# Altium PCB PCB_big.PcbDoc (part 1 of 2)
Units mil, origin at the board's own origin, x right, y up, seen from the top; angles counter-clockwise.
Board outline 3000 x 3000 mil, 2 copper layers (Top Layer, Bottom Layer); 49 components, 129 nets, 355 pads, 242 vias.
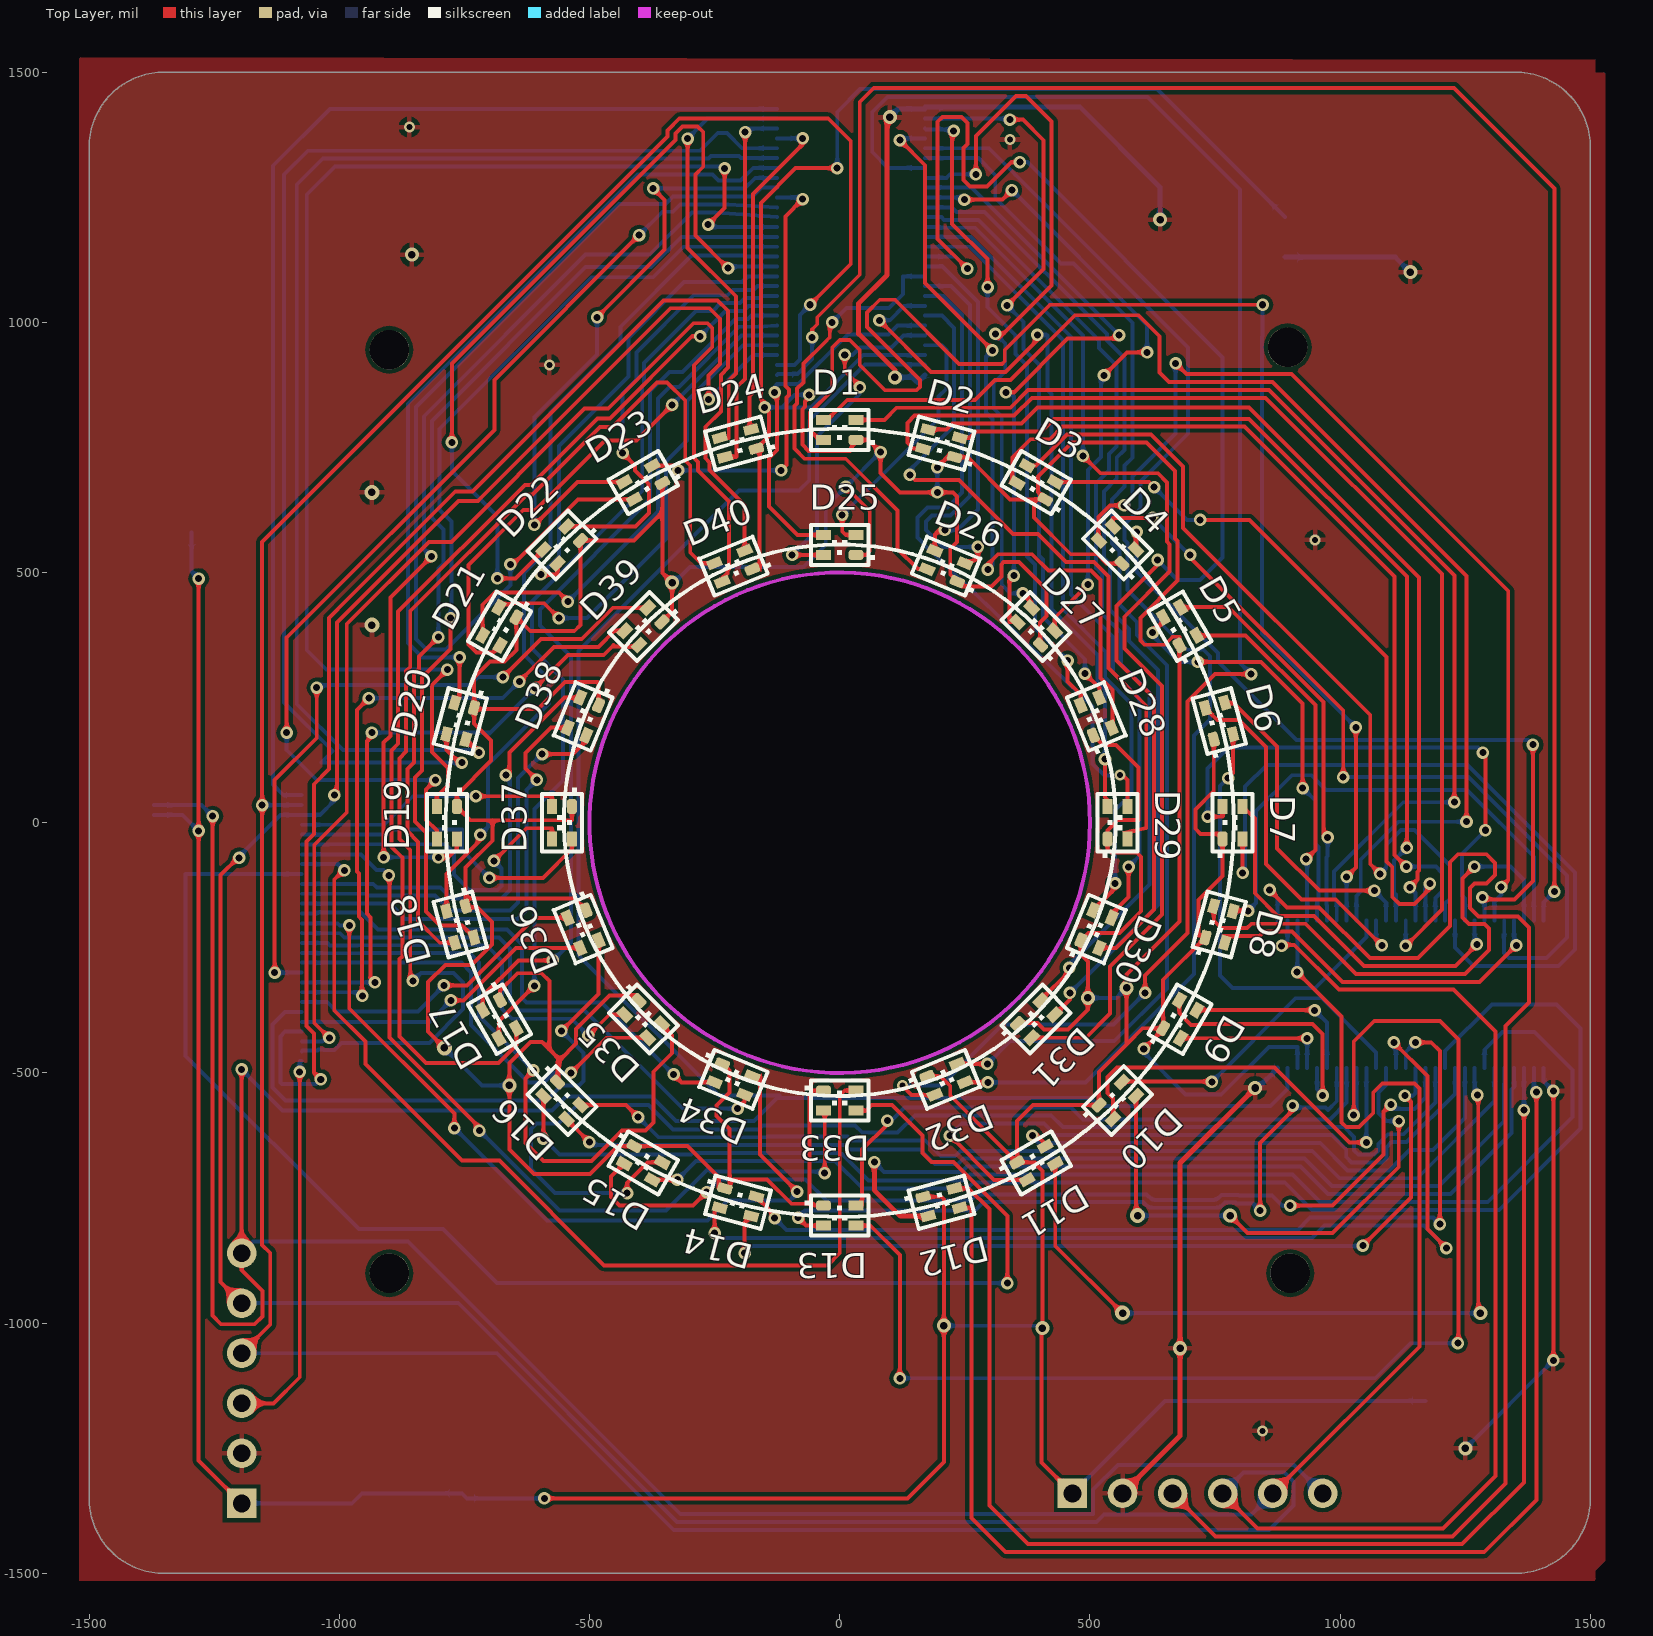
[diagram p0: Top Layer view]
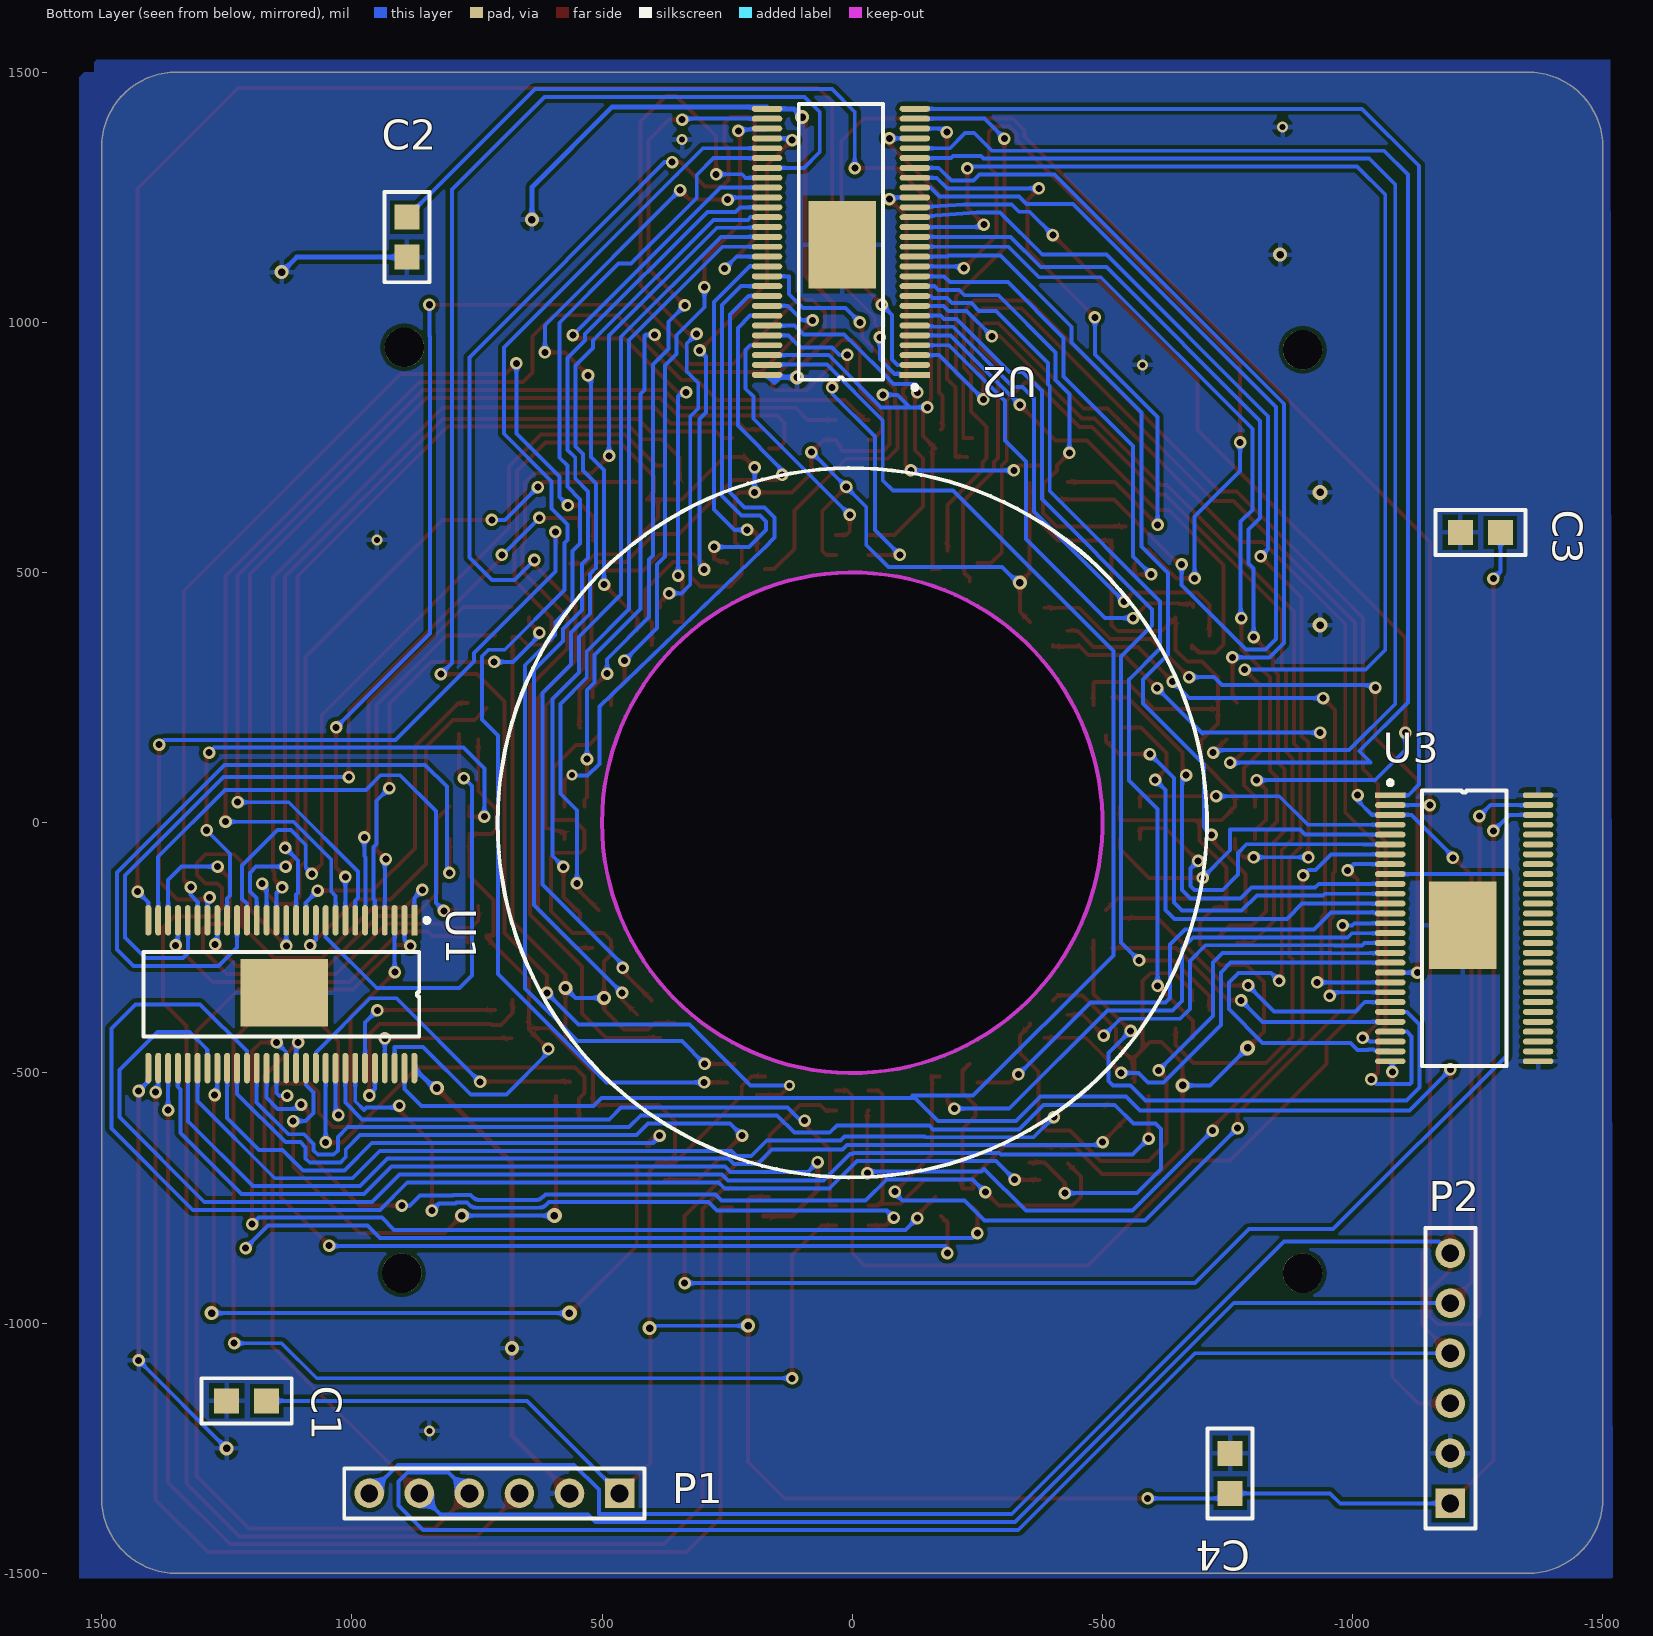
[diagram p1: Bottom Layer view, seen from below]

## Layer stack, top to bottom
Top Solder: solder mask 0.4, Solder Resist, Dk 3.5
Top Layer: signal copper 1.4
Dielectric 1: dielectric 12.6, FR-4, Dk 4.8
Bottom Layer: signal copper 1.4
Bottom Solder: solder mask 0.4, Solder Resist, Dk 3.5

## Board outline
-1350,-1500 cw(c-1350,-1350) -1500,-1350 -1500,1350 cw(c-1350,1350) -1350,1500 1350,1500 cw(c1350,1350) 1500,1350 1500,-1350 cw(c1350,-1350) 1350,-1500
cut-out: 0,-500 cw(c0,0) -500,0 cw(c0,0) 0,500 cw(c0,0) 500,0 cw(c0,0)

## Design rules (kind name [scope] priority, off if disabled: settings)
Clearance [All] p1: gap=7.87 ignorepadtopadclearanceinfootprint=FALSE except(0: Arc-Hole Track-Hole SMDPad-Hole THPad-Hole Via-Hole Fill-Hole Poly-Hole Region-Hole Text-Hole)
HoleSize [All] p1: absolutevalues=TRUE maxlimit=200 minlimit=10 maxpercent=80.000 minpercent=20.000
HoleToHoleClearance [All] p1: gap=7.87 allowstackedmicrovias=TRUE
MinimumSolderMaskSliver [All] p1: minsoldermaskwidth=7.87
PolygonConnect [All] p1: connectstyle=Relief reliefconductorwidth=10 reliefentries=4 polygonreliefangle="90 Angle" airgapwidth=10
RoutingVias [All] p1: holewidth=14 width=25 viastyle="Through Hole" minholewidth=10 minwidth=10 maxholewidth=50 maxwidth=80
SilkToSilkClearance [All] p1: silktosilkclearance=7.87
SilkToSolderMaskClearance [IsPad] p1: minsilkscreentomaskgap=7.87 clearancetoexposedcopper=TRUE
SolderMaskExpansion [All] p1: expansion=4
Width [All] p1: maxlimit=80 minlimit=6 preferedwidth=7.87
25 further rules are at their usual default settings.

## Components (designator, comment, footprint, x,y, rotation, side; value= is the part's Value field where it differs from the comment)
C1 "Cap" CAP_0805 1210,-1155 r180 bottom
C2 "Cap" CAP_0805 890,1170 r90 bottom
C3 "Cap" CAP_0805 -1255,580 r180 bottom
C4 "Cap" CAP_0805 -755,-1300 r270 bottom
D1 "LED1616" LED1616 0,785 r0 top
D2 "LED1616" LED1616 203.17,758.25 r345 top
D3 "LED1616" LED1616 392.5,679.83 r330 top
D4 "LED1616" LED1616 555.08,555.08 r315 top
D5 "LED1616" LED1616 679.83,392.5 r300 top
D6 "LED1616" LED1616 758.25,203.17 r285 top
D7 "LED1616" LED1616 785,0 r270 top
D8 "LED1616" LED1616 758.25,-203.17 r255 top
D9 "LED1616" LED1616 679.83,-392.5 r240 top
D10 "LED1616" LED1616 555.08,-555.08 r225 top
D11 "LED1616" LED1616 392.5,-679.83 r210 top
D12 "LED1616" LED1616 203.17,-758.25 r195 top
D13 "LED1616" LED1616 0,-785 r180 top
D14 "LED1616" LED1616 -203.17,-758.25 r165 top
D15 "LED1616" LED1616 -392.5,-679.83 r150 top
D16 "LED1616" LED1616 -555.08,-555.08 r135 top
D17 "LED1616" LED1616 -679.83,-392.5 r120 top
D18 "LED1616" LED1616 -758.25,-203.17 r105 top
D19 "LED1616" LED1616 -785,0 r90 top
D20 "LED1616" LED1616 -758.25,203.17 r75 top
D21 "LED1616" LED1616 -679.83,392.5 r60 top
D22 "LED1616" LED1616 -555.08,555.08 r45 top
D23 "LED1616" LED1616 -392.5,679.83 r30 top
D24 "LED1616" LED1616 -203.17,758.25 r15 top
D25 "LED1616" LED1616 0,555 r0 top
D26 "LED1616" LED1616 212.39,512.75 r337.5 top
D27 "LED1616" LED1616 392.44,392.44 r315 top
D28 "LED1616" LED1616 512.75,212.39 r292.5 top
D29 "LED1616" LED1616 555,0 r270 top
D30 "LED1616" LED1616 512.75,-212.39 r247.5 top
D31 "LED1616" LED1616 392.44,-392.44 r225 top
D32 "LED1616" LED1616 212.39,-512.75 r202.5 top
D33 "LED1616" LED1616 0,-555 r180 top
D34 "LED1616" LED1616 -212.39,-512.75 r157.5 top
D35 "LED1616" LED1616 -392.44,-392.44 r135 top
D36 "LED1616" LED1616 -512.75,-212.39 r112.5 top
D37 "LED1616" LED1616 -555,0 r90 top
D38 "LED1616" LED1616 -512.75,212.39 r67.5 top
D39 "LED1616" LED1616 -392.44,392.44 r45 top
D40 "LED1616" LED1616 -212.39,512.75 r22.5 top
P1 "Header 6" HDR1X6 465,-1340 r0 bottom
P2 "Header 6" HDR1X6 -1195,-1360 r90 bottom
U1 "Tlc5955" TCL5955-2 875,-195 r270 bottom
U2 "Tlc5955" TCL5955-2 -125,895 r0 bottom
U3 "Tlc5955" TCL5955-2 -1075,55 r180 bottom

## Footprints (in the part's own frame and the unit in brackets; to place one, negate y for a bottom-side part, rotate by r counter-clockwise, add the part's x,y. Pads: shape width x height; smd on the part's side, far side on the other; paste and mask are expansions set on the pad)
CAP_0805 [mil]
  rect 50x50 smd: 1(-40,0) 2(40,0)
  silkscreen extent -90,-45 90,45
HDR1X6 [mm] "Connector; Header; 6 Position"
  rect 1.5x1.5 hole 0.9: 1(0,0)
  round 1.5 hole 0.9: 2(2.54,0) 3(5.08,0) 4(7.62,0) 5(10.16,0) 6(12.7,0)
  silkscreen extent -1.27,-1.27 13.97,1.27
LED1616 [mil]
  rrect50% 29.53x19.68 smd: 1(32.5,-20)
  rect 29.53x19.68 smd: 2(-32.5,-20) 3(-32.5,20) 4(32.5,20)
  silkscreen extent -58,-40 70,40
TCL5955-2 [mm]
  rect 1.55x0.3 smd: 1(0,0)
  oval 1.55x0.3 smd: 2(0,-0.5) 3(0,-1) 4(0,-1.5) 5(0,-2) 6(0,-2.5) 7(0,-3) 8(0,-3.5) 9(0,-4) 10(0,-4.5) 11(0,-5) 12(0,-5.5) 13(0,-6) 14(0,-6.5) 15(0,-7) 16(0,-7.5) 17(0,-8) 18(0,-8.5) 19(0,-9) 20(0,-9.5) 21(0,-10) 22(0,-10.5) 23(0,-11) 24(0,-11.5) 25(0,-12) 26(0,-12.5) 27(0,-13) 28(0,-13.5) 29(7.5,-13.5) 30(7.5,-13) 31(7.5,-12.5) 32(7.5,-12) 33(7.5,-11.5) 34(7.5,-11) 35(7.5,-10.5) 36(7.5,-10) 37(7.5,-9.5) 38(7.5,-9) 39(7.5,-8.5) 40(7.5,-8) 41(7.5,-7.5) 42(7.5,-7) 43(7.5,-6.5) 44(7.5,-6) 45(7.5,-5.5) 46(7.5,-5) 47(7.5,-4.5) 48(7.5,-4) 49(7.5,-3.5) 50(7.5,-3) 51(7.5,-2.5) 52(7.5,-2) 53(7.5,-1.5) 54(7.5,-1) 55(7.5,-0.5) 56(7.5,0)
  rect 3.429x4.445 smd: 57(3.683,-6.604)
  silkscreen extent -0.13,-13.75 5.89,0.76

## Part data
C1 C2 C3 C4: "Capacitor"
D1 D2 D3 D4 D5 D6 D7 D8 D9 D10 D11 D12 D13 D14 D15 D16 D17 D18 D19 D20 D21 D22 D23 D24 D25 D26 D27 D28 D29 D30 D31 D32 D33 D34 D35 D36 D37 D38 D39 D40: library part LED
P1 P2: "Header, 6-Pin"
U1 U2 U3: library part Tlc5955_2

## Free pads (board coordinates)
  round 78.74 hole 78.74: 0(-900,-900) 0(-900,945) 0(895,950) 0(900,-900)

## Via types
v1: diameter 25, hole 14, Top Layer to Bottom Layer, 214 vias
v2: diameter 28, hole 15, Top Layer to Bottom Layer, 16 vias
v3: diameter 22, hole 12, Top Layer to Bottom Layer, 7 vias
v4: diameter 30, hole 15, Top Layer to Bottom Layer, 5 vias

## Nets (pads, with @x,y where several pads share a name; then routed paths per layer and width w, separated by ;. In a path a pad name is that pad's centre, name@x,y a point inside that pad or via, vN(x,y) a via of type N, cw(c..) or ccw(c..) an arc to the next point about the centre after c; other vN are vias at no path point)
D1_B: D1.4 U1.7 | length 2224.3
  Top Layer w7.87: D1.4@32.5,805 89,805 113.25,829.25 340.94,829.25 376.43,864.75 857.52,864.75 1228,494.27 v1(1228,41)
  Bottom Layer w7.87: U1.7@993.11,-195 993.11,-155.11 988,-150 988,-97 1126,41 v1(1228,41)
D1_G: D1.3 U1.9 | length 2488.3
  Top Layer w7.87: D1.3@-32.5,805 -25,805 15,845 270,845 310,885 341,885 470,1014 597,1014 639,972 639,899.6 658.1,880.5 864.49,880.5 1252.31,492.67 v1(1252.31,2)
  Bottom Layer w7.87: U1.9@1032.48,-195 1032.48,-146 1041,-137.48 1041,-73.11 1116.11,2 v1(1252.31,2)
D1_R: D1.2 U1.8 | length 2886.5
  Top Layer w7.87: D1.2@-32.5,765 -40.24,765 -58.44,783.21 -58.44,789.64 -59.07,790.27 -59.07,819.73 -15,863.81 -15,950 0,965 20,965 40,945 40,915 90.81,864.19 153.44,864.19 160,870.75 160,885 54.78,990.22 54.78,1019.78 80,1045 110,1045 238.34,916.66 324.3,916.66 329.7,922.07 329.7,944.51 420.19,1035 v1(845,1035) ; v1(1012.79,-108) 1031.31,-89.48 v1(1031.31,190.67)
  Bottom Layer w7.87: v1(845,1035) 845,972.38 843.82,971.2 843.82,378.17 v1(1031.31,190.67) ; U1.8@1012.8,-195 v1(1012.79,-108)
D2_B: D2.4 U1.13 | length 1738.4
  Top Layer w7.87: D2.4@239.74,769.16 259.25,769.16 272.1,782.01 403.23,782.01 428.29,807.07 817.93,807.07 1133,492 v1(1133,-50)
  Bottom Layer w7.87: U1.13@1111.22,-195 1111.22,-143.69 1107.69,-140.15 1107.69,-75.31 v1(1133,-50)
D2_G: D2.3 U1.15 | length 1836.7
  Top Layer w7.87: D2.3@176.96,785.98 213,785.98 224.77,797.76 362.74,797.76 394.93,829.94 817.33,829.94 1157.31,489.96 1157.31,-95.69 1154.7,-98.3 1154.7,-113.3 v1(1139,-129)
  Bottom Layer w7.87: v1(1139,-129) 1150.59,-140.59 U1.15@1150.59,-195
D2_R: D2.2 U1.14 | length 2134.5
  Top Layer w7.87: D2.2@166.6,747.34 147.66,747.34 135,760 135,799 149.5,813.5 348.42,813.5 383.92,849 851,849 1203.31,496.69 1203.31,-173.59 v1(1130.9,-246)
  Bottom Layer w7.87: v1(1130.9,-246) U1.14@1130.91,-195
D3_B: D3.4 U1.16 | length 1471.3
  Top Layer w7.87: D3.4@430.65,680.9 618.1,680.9 v1(628.25,670.75) ; v1(720,605) 818.59,605 1092.63,330.96 1092.63,-77.16 1103.95,-88.49 1103.95,-148 1118.6,-162.65 1148,-162.65 1178.97,-131.67 v1(1178.97,-121.73)
  Bottom Layer w7.87: v1(628.25,670.75) 694,605 v1(720,605) ; U1.16@1170.28,-195 1170.27,-130.42 v1(1178.97,-121.73)
D3_G: D3.3 U1.18 | length 1685.6
  Top Layer w7.87: D3.3@374.35,713.4 392.07,713.4 454.24,775.58 622.28,775.58 685.81,712.05 685.81,589.19 1060,215 1060,-82.36 v1(1079.64,-102)
  Bottom Layer w7.87: v1(1079.64,-102) 1091.94,-89.7 1091.94,-44.44 1121.86,-14.51 1148,-14.51 1219.06,-85.57 1219.06,-151.95 1209.64,-161.37 U1.18@1209.64,-195
D3_R: D3.2 U1.17 | length 1734.2
  Top Layer w7.87: D3.2@354.35,678.76 344.84,688.28 344.84,729.84 381.26,766.26 419.95,766.26 445.02,791.32 808.68,791.32 1108.38,491.62 1108.38,-64.08 v1(1132,-87.7)
  Bottom Layer w7.87: v1(1132,-87.7) 1191.01,-87.7 1203.31,-100 1203.31,-137.31 1189.96,-150.66 U1.17@1189.96,-195
D4_B: D4.4 U1.22 | length 1497.2
  Top Layer w7.87: D4.4@592.2,546.24 592.2,580.2 v1(593,581) ; v1(1284,-149) 1288,-153 1348,-153 1385,-116 v1(1385,156)
  Bottom Layer w7.87: v1(593,581) 593,502 755.75,339.25 755.75,322.25 912.25,165.75 1375.25,165.75 v1(1385,156) ; v1(1284,-149) 1288.38,-153.38 U1.22@1288.39,-195
D4_G: D4.3 U1.24 | length 1634.3
  Top Layer w7.87: D4.3@546.24,592.2 546.24,609 612.31,609 v1@619.25,602.06 ; v1(700,535) 700,530 1006,224 v1(1006,91)
  Bottom Layer w7.87: v1(625,609) 699,535 v1(700,535) ; v1(1006,91) 1256.73,91 1453,-105.27 1453,-229.5 1412.5,-270 1337,-270 1327,-260 1327,-223 1327.75,-223 U1.24@1327.76,-195
D4_R: D4.2 U1.23 | length 1958
  Top Layer w7.87: D4.2@517.96,563.92 517.03,563.92 517.03,611.03 540,634 v1(568,634) ; v1(671,918) 692.76,896.24 902.76,896.24 1335.69,463.31 1335.69,-114.31 v1(1321.37,-128.63)
  Bottom Layer w7.87: v1(568,634) 584.94,650.94 584.94,691.94 671,778 v1(671,918) ; U1.23@1308.07,-195 1308.07,-157.93 1321.37,-144.63 v1(1321.37,-128.63)
D5_B: D5.4 U1.4 | length 733.3
  Top Layer w7.87: D5.4@713.4,374.35 811.1,374.35 950.52,234.93 950.52,-54.16 v1(932,-72.69)
  Bottom Layer w7.87: v1(932,-72.69) 934.05,-74.74 U1.4@934.05,-195
D5_G: D5.3 U1.6 | length 805.4
  Top Layer w7.87: D5.3@680.9,430.65 777.08,430.65 966.69,241.04 966.69,-20.69 v1(975,-29)
  Bottom Layer w7.87: U1.6@973.43,-195 973.42,-165 972.25,-163.83 972.25,-69 975,-66.25 v1(975,-29)
D5_R: D5.2 U1.5 | length 849.2
  Top Layer w7.87: v1(625,380) 646.26,401.26 D5.2@646.26,410.65 ; v1(715.69,321.31) 841.88,321.31 925,238.19 v1(925,69)
  Bottom Layer w7.87: v1(625,380) 625,374.09 677.78,321.31 v1(715.69,321.31) ; v1(925,69) 925.52,69 950.52,44 950.52,-42.59 956.31,-48.38 956.31,-152.39 953.74,-154.97 U1.5@953.74,-195
D6_B: D6.4 U1.10 | length 870.5
  Top Layer w7.87: v1(775.94,88.98) 785.98,99.02 D6.4@785.98,176.96
  Bottom Layer w7.87: v1(775.94,88.98) 760,73.04 760,-305 785,-330 950.16,-330 1052.16,-228 U1.10@1052.16,-195
D6_G: D6.3 U1.12 | length 643.1
  Top Layer w7.87: D6.3@769.16,239.74 769.16,239 787,239 874,152 874,-51.31 958.44,-135.75 v1(1068.29,-135.75)
  Bottom Layer w7.87: v1(1068.29,-135.75) 1091.53,-159 U1.12@1091.53,-195
D6_R: D6.2 U1.11 | length 740.3
  Top Layer w7.87: D6.2@730.52,229.39 754.34,205.58 797.83,205.58 852,151.41 852,-82 923,-153 991,-153 v1(1083,-245)
  Bottom Layer w7.87: U1.11@1071.85,-195 1071.85,-233.85 v1(1083,-245)
D7_B: D7.4 U1.19 | length 1484.1
  Top Layer w7.87: v1(805,-100) D7.4@805,-32.5
  Bottom Layer w7.87: v1(805,-100) 810,-95 810,72 853.31,115.31 1254.69,115.31 1469,-99 1469,-253 1436,-286 1266,-286 1229.33,-249.33 U1.19@1229.33,-195
D7_G: D7.3 U1.21 | length 754.9
  Top Layer w7.87: D7.3@805,32.5 829.31,8.19 829.31,-140.81 874.53,-186.03 947.78,-186.03 1047.7,-285.95 1052.62,-285.95 1052.73,-286.06 1229.94,-286.06 v1(1273,-243)
  Bottom Layer w7.87: U1.21@1268.7,-195 1268.7,-238.7 v1(1273,-243)
D7_R: D7.2 U1.20 | length 1077.1
  Top Layer w7.87: v1(735,12) 765,12 D7.2@765,32.5 ; v1(1285,140) 1290,135 v1(1290,-15)
  Bottom Layer w7.87: v1(735,12) 735,108 777,150 1275,150 v1(1285,140) ; U1.20@1249.01,-195 1249.01,-151 1243,-144.99 1243,-62 v1(1290,-15)
D8_B: D8.4 U1.25 | length 723.5
  Top Layer w7.87: D8.4@769.16,-239.74 769.16,-226.37 838.84,-226.37 847.69,-217.52 904.03,-217.52 1004.32,-317.81 1278.31,-317.81 1351.12,-245 v1(1352,-245)
  Bottom Layer w7.87: U1.25@1347.44,-195 1347.44,-240.44 v1(1352,-245)
D8_G: D8.3 U1.27 | length 1015.7
  Top Layer w7.87: D8.3@785.98,-176.96 785.98,-176 v1(816,-176)
  Bottom Layer w7.87: v1(816,-176) 832,-160 832,23.06 903.84,94.9 942.77,94.9 971.99,65.69 1253.12,65.69 1386.81,-68 U1.27@1386.81,-195
D8_R: D8.2 U1.26 | length 1057.1
  Top Layer w7.87: D8.2@747.35,-166.6 747.35,-195.35 762.62,-210.62 813.6,-210.62 822.45,-201.77 930.87,-201.77 1031.16,-302.06 1249.25,-302.06 1297.31,-254 1297.31,-211.56 1288.44,-202.69 1257.66,-202.69 1243.94,-188.97 1243.94,-111.75 v1(1268,-87.69)
  Bottom Layer w7.87: v1(1268,-87.69) 1340,-87.69 1367.12,-114.81 U1.26@1367.12,-195
D9_B: D9.4 U1.53 | length 312.8
  Top Layer w7.87: D9.4@680.9,-430.65 v1(934.05,-430.65)
  Bottom Layer w7.87: U1.53@934.05,-490.28 v1(934.05,-430.65)
D9_G: D9.3 U1.51 | length 361.3
  Top Layer w7.87: D9.3@713.4,-374.35 948.35,-374.35 v1(949,-375)
  Bottom Layer w7.87: v1(949,-375) 973.42,-399.42 U1.51@973.43,-490.28
D9_R: D9.2 U1.52 | length 513.7
  Top Layer w7.87: D9.2@678.76,-354.35 678.76,-380.52 702.11,-403.87 719.43,-403.87 721.55,-401.76 944.76,-401.76 965,-422 v1(965,-545)
  Bottom Layer w7.87: U1.52@953.74,-490.28 953.74,-531.74 965,-543 v1(965,-545)
D10_B: D10.4 U1.47 | length 824.9
  Top Layer w7.87: D10.4@546.24,-592.2 546.24,-551.24 534.71,-539.71 534.71,-508.29 554.25,-488.75 868.75,-488.75 1018.8,-638.8 v1(1052.16,-638.8)
  Bottom Layer w7.87: v1(1052.16,-638.8) U1.47@1052.16,-490.28
D10_G: D10.3 U1.45 | length 1065.9
  Top Layer w7.87: D10.3@592.2,-546.24 592.2,-782.2 v4(595,-785) ; v2(780,-785) 815,-820 985,-820 1117,-688 v1(1117,-596)
  Bottom Layer w7.87: v4(595,-785) v2(780,-785) ; U1.45@1091.53,-490.28 1091.53,-523.84 1076.69,-538.69 1076.69,-580 1092.69,-596 v1(1117,-596)
D10_R: D10.2 U1.46 | length 654.2
  Top Layer w7.87: D10.2@563.92,-517.96 564.84,-517.03 742.59,-517.03 v1(743.51,-517.96)
  Bottom Layer w7.87: v1(743.51,-517.96) 910.78,-350.69 963.69,-350.69 1071.85,-458.85 U1.46@1071.85,-490.28
D11_B: D11.4 U1.38 | length 1373
  Top Layer w7.87: v1(220,-625) 308.4,-713.4 D11.4@374.35,-713.4
  Bottom Layer w7.87: v1(220,-625) 244.31,-600.69 408,-600.69 431.33,-624.02 983.62,-624.02 1012.1,-652.5 1012.1,-668 1022.96,-678.86 1084,-678.86 1092.22,-670.63 1092.22,-648.49 1102.59,-638.13 1132.86,-638.13 1229.33,-541.66 U1.38@1229.33,-490.28
D11_G: D11.3 U1.36 | length 1557.4
  Top Layer w7.87: D11.3@430.65,-680.9 430.65,-845.65 v4(565,-980) ; v1(1274,-544) 1275.81,-545.81 v2@1275.81,-975
  Bottom Layer w7.87: v4(565,-980) v2(1280,-980) ; U1.36@1268.7,-490.28 1268.7,-538.7 v1(1274,-544)
D11_R: D11.2 U1.37 | length 1077
  Top Layer w7.87: v1(385,-625) 394,-625 406,-637 406,-646.26 D11.2@410.65,-646.26
  Bottom Layer w7.87: v1(385,-625) 385,-626.87 397.89,-639.76 960.12,-639.76 1014.96,-694.61 1097.37,-694.61 1138.1,-653.87 1185.39,-653.87 1249.01,-590.25 U1.37@1249.01,-490.28
D12_B: D12.4 U1.32 | length 1676.4
  Top Layer w10: v1(69,-678) 69,-734 120.98,-785.98 D12.4@176.96,-785.98
  Bottom Layer w7.87: v1(69,-678) 88.81,-697.81 243.12,-697.81 253.91,-687.01 920.63,-687.01 975.47,-741.85 1220.3,-741.85 1342.56,-619.59 1342.56,-533 1347.44,-528.12 U1.32@1347.44,-490.28
D12_G: D12.3 U1.30 | length 2706.7
  Top Layer w7.87: D12.3@239.74,-769.16 260,-769.16 262.84,-772 262.84,-1388.84 331.24,-1457.24 1287.76,-1457.24 1392,-1353 v1(1392,-538.19)
  Bottom Layer w7.87: U1.30@1386.81,-490.28 1386.81,-533 v1(1392,-538.19)
D12_R: D12.2 U1.31 | length 2657.8
  Top Layer w7.87: D12.2@229.39,-730.52 257.52,-730.52 299,-772 299,-1364 376.5,-1441.5 1243.5,-1441.5 1367.12,-1317.88 v1(1367.12,-574)
  Bottom Layer w7.87: v1(1367.12,-574) U1.31@1367.12,-490.28
D13_B: D13.4 U1.50 | length 1410.4
  Top Layer w7.87: v1(-83,-789) -67,-805 D13.4@-32.5,-805 ; v1(840,-775) 840,-640 905,-575 v1(905,-565)
  Bottom Layer w7.87: v1(-83,-789) -69,-775 270,-775 286.81,-758.19 606.11,-758.19 610.61,-762.69 ; 610.64,-762.69 611.89,-763.94 612.06,-763.94 613.17,-765.05 613.47,-765.05 614.45,-766.04 614.88,-766.04 615.73,-766.89 616.29,-766.89 617.01,-767.61 617.7,-767.61 618.29,-768.2 619.1,-768.2 619.56,-768.66 620.5,-768.66 620.83,-768.99 621.9,-768.99 622.1,-769.19 623.3,-769.19 623.37,-769.25 753.27,-769.25 753.33,-769.19 754.49,-769.19 754.66,-769.02 755.7,-769.02 755.99,-768.72 756.9,-768.72 757.31,-768.31 758.09,-768.31 758.62,-767.79 759.28,-767.79 759.92,-767.14 760.46,-767.14 761.22,-766.38 761.63,-766.38 762.51,-765.5 762.8,-765.5 763.79,-764.5 763.96,-764.5 765.07,-763.39 ; 765.11,-763.39 769.31,-759.19 790.69,-759.19 792.25,-760.75 825.75,-760.75 v1(840,-775) ; v1(905,-565) 909.31,-569.31 970.87,-569.31 975.56,-574 993.11,-556.45 U1.50@993.11,-490.28
D13_G: D13.3 U1.48 | length 2593.9
  Top Layer w7.87: D13.3@32.5,-805 61,-805 120,-864 v1(120,-1110) ; v1(1027,-584) 1027,-437 1068,-396 1199,-396 1236.31,-433.31 1236.31,-1038.69 v1(1235,-1040)
  Bottom Layer w7.87: v1(120,-1110) 1070,-1110 1140,-1040 v1(1235,-1040) ; v1(1027,-584) 1032.48,-578.52 U1.48@1032.48,-490.28
D13_R: D13.2 U1.49 | length 1224.8
  Top Layer w7.87: D13.2@32.5,-765 45,-765 45,-737.82 44.69,-737.51 44.69,-653.3 95,-602.99 v1(95,-595)
  Bottom Layer w7.87: v1(95,-595) 102.99,-595 129.27,-568.73 461.72,-568.73 485.51,-592.52 979.58,-592.52 1012.79,-559.3 U1.49@1012.8,-490.28
D14_B: D14.4 U1.44 | length 2058.8
  Top Layer w7.87: v1(-250,-820) -250,-777.47 -241.69,-769.16 D14.4@-239.74,-769.16 ; v1(1107,-439) 1174,-506 1174,-812 v1(1212,-850)
  Bottom Layer w7.87: v1(-250,-820) -240,-830 943.35,-830 968.29,-805.06 1167.06,-805.06 v1(1212,-850) ; v1(1107,-439) 1111.22,-443.22 U1.44@1111.22,-490.28
D14_G: D14.3 U1.42 | length 1744.6
  Top Layer w7.87: v1(-190,-860) -190,-799.03 D14.3@-176.96,-785.98 ; v1(1045.19,-844.81) 1141.31,-748.69 1141.31,-557.59 v1(1129.16,-545.43)
  Bottom Layer w7.87: v1(-190,-860) -190,-849.62 -186.13,-845.75 1044.25,-845.75 v1(1045.19,-844.81) ; v1(1129.16,-545.43) 1145.16,-545.43 1150.59,-540 U1.42@1150.59,-490.28
D14_R: D14.2 U1.43 | length 1873
  Top Layer w7.87: D14.2@-166.6,-747.34 -130,-783.95 v1(-130,-790) ; v1(1150,-439) 1181.94,-439 1199,-456.06 v1(1199,-802)
  Bottom Layer w7.87: v1(-130,-790) -106.69,-813.31 915.31,-813.31 939.53,-789.09 1186.09,-789.09 v1(1199,-802) ; U1.43@1130.91,-490.28 1130.9,-458.1 v1(1150,-439)
D15_B: D15.4 U1.41 | length 1985.3
  Top Layer w7.87: D15.4@-430.65,-680.9 -456.8,-707.05 -456.8,-748.2 -440,-765 -293,-765 v1(-266,-738) ; v1(900,-765) 984.95,-765 1086.84,-663.11 1086.84,-577.16 v1(1101,-563)
  Bottom Layer w7.87: v1(-266,-738) -240.69,-712.69 -68.86,-712.69 -26.55,-755 260.93,-755 273.48,-742.44 612.63,-742.44 617.13,-746.94 618.41,-748.19 618.58,-748.19 619.7,-749.3 619.99,-749.3 620.98,-750.29 621.4,-750.29 622.26,-751.14 622.81,-751.14 623.53,-751.86 624.22,-751.86 624.81,-752.45 625.62,-752.45 626.08,-752.91 627.03,-752.91 627.35,-753.24 628.43,-753.24 628.62,-753.44 629.82,-753.44 629.89,-753.5 746.75,-753.5 746.81,-753.45 747.96,-753.45 748.14,-753.27 749.17,-753.27 749.47,-752.98 750.37,-752.98 750.78,-752.57 751.57,-752.57 752.09,-752.04 752.75,-752.04 753.4,-751.39 753.93,-751.39 754.7,-750.63 755.11,-750.63 755.99,-749.75 756.27,-749.75 757.27,-748.76 757.43,-748.76 758.55,-747.64 ; 758.59,-747.64 762.79,-743.44 797.21,-743.44 798.77,-745 863.85,-745 883.85,-765 v1(900,-765) ; v1(1101,-563) 1101,-571.69 1148,-571.69 1170.27,-549.41 U1.41@1170.28,-490.28
D15_G: D15.3 U1.39 | length 2550.9
  Top Layer w7.87: D15.3@-374.35,-713.4 -324.83,-713.4 v1(-324.43,-713)
  Bottom Layer w7.87: v1(-324.43,-713) -287.11,-675.68 -165.42,-675.68 -9.34,-675.69 45.9,-730.93 254.53,-730.93 256.16,-729.3 266.96,-718.5 889.14,-718.5 943.98,-773.35 1317.77,-773.35 1480.06,-611.06 1480.06,-411.06 1432,-363 1303,-363 1209.64,-456.36 U1.39@1209.64,-490.28
D15_R: D15.2 U1.40 | length 2437.8
  Top Layer w7.87: v1(-425,-740) -425,-720 -383.76,-678.76 D15.2@-354.35,-678.76
  Bottom Layer w7.87: v1(-425,-740) -569,-740 -617,-692 -617,-612 -606,-601 -561.76,-601 -524.44,-563.69 -382.19,-563.69 -333.2,-612.68 -161.6,-612.68 -153.91,-605 30.62,-605 44.93,-619.31 115.69,-619.31 150.06,-584.94 422.56,-584.94 445.89,-608.27 1008.1,-608.27 1027.85,-628.02 1027.85,-654.96 1036,-663.11 1068,-663.11 1076.48,-654.63 1076.48,-641.47 1095.57,-622.38 1126.34,-622.38 1189.96,-558.76 U1.40@1189.96,-490.28
D16_B: D16.4 U1.35 | length 2629.4
  Top Layer w7.87: v1(-592.2,-631) D16.4@-592.2,-546.24
  Bottom Layer w7.87: v1(-592.2,-631) -560.2,-663 -296.7,-663 -293.63,-659.93 -158.89,-659.93 -2.82,-659.94 -0.45,-662.3 4.77,-662.3 51.66,-709.19 57.65,-715.18 248.01,-715.18 249.64,-713.55 260.44,-702.76 904.88,-702.76 959.73,-757.6 1294.71,-757.6 1464.31,-588 1464.31,-494.31 1388,-418 1324,-418 1288.38,-453.62 U1.35@1288.39,-490.28
D16_G: D16.3 U1.33 | length 2098.6
  Top Layer w7.87: D16.3@-546.24,-592.2 v1(-500.45,-637.99)
  Bottom Layer w7.87: v1(-500.45,-637.99) -494.26,-644.18 -152.37,-644.18 10.66,-644.19 19.29,-652.82 160.8,-652.82 185.67,-677.7 190.03,-682.06 236.59,-682.06 247.39,-671.26 928.71,-671.26 983.55,-726.1 1197.65,-726.1 1326.81,-596.94 1326.81,-521.47 1327.75,-521.47 U1.33@1327.76,-490.28
D16_R: D16.2 U1.34 | length 2026.8
  Top Layer w7.87: D16.2@-517.96,-563.92 -427.08,-563.92 v1(-403,-588)
  Bottom Layer w7.87: v1(-403,-588) -362.57,-628.43 -145.85,-628.43 -144.2,-626.81 15.55,-626.81 23.8,-635.06 170.76,-635.06 170.82,-635 197.77,-661.95 202.13,-666.31 230.07,-666.31 240.87,-655.51 944.12,-655.51 998.96,-710.35 1153.87,-710.35 1308.07,-556.15 U1.34@1308.07,-490.28
D17_B: D17.4 U2.7 | length 1783.4
  Top Layer w7.87: D17.4@-713.4,-374.35 -713.4,-346.13 -642.27,-275 v1(-573,-275)
  Bottom Layer w7.87: v1(-573,-275) -537.32,-239.32 -537.32,331.94 -599.31,393.94 -599.31,426.31 -378.81,646.82 -378.81,862.24 -340,901.05 -314.13,901.05 -208.44,1006.75 -183.21,1006.75 -176.84,1013.11 U2.7@-125,1013.11
D17_G: D17.3 U2.9 | length 1842.7
  Top Layer w7.87: D17.3@-680.9,-430.65 -680.9,-395.9 -611,-326 v1(-610,-326)
  Bottom Layer w7.87: v1(-610,-326) -610,27.25 -553.06,84.18 -553.06,285.79 -615.06,347.78 -615.06,442.06 -394.56,662.56 -394.56,872.81 -390.72,876.64 -390.72,918.89 -287.12,1022.5 -253.62,1022.5 -237.87,1038.24 -199.25,1038.24 -188.95,1048.54 -160,1048.54 -156.06,1052.48 U2.9@-125,1052.48
D17_R: D17.2 U2.8 | length 2179.3
  Top Layer w7.87: D17.2@-646.26,-410.65 -646.26,-444 -682.26,-480 -826.46,-480 -879.31,-427.15 -879.31,-272.54 -873.9,-267.13 -873.9,-69.88 -895.56,-48.23 -895.56,144.52 -882.24,157.84 -882.24,421.97 -629.07,675.14 -616.87,675.14 -484,808.01 -459.48,808.01 -295.49,972 v1(-279,972)
  Bottom Layer w7.87: v1(-279,972) -228.51,1022.49 -192.59,1022.49 -182.29,1032.8 U2.8@-125,1032.8
D18_B: D18.4 U2.13 | length 1726.1
  Top Layer w7.87: D18.4@-785.98,-176.96 -785.98,-102.05 -718,-34.07 v1(-718,-24)
  Bottom Layer w7.87: v1(-718,-24) -702.69,-8.69 -702.69,116.31 -581,238 -581,286 -631,336 -631,499 -578,552 -578,820 -438,960 -438,991 -296,1133 -192,1133 -190.22,1131.22 U2.13@-125,1131.22
D18_G: D18.3 U2.15 | length 1981.6
  Top Layer w7.87: v1(-802,371) -840.41,332.59 -840.41,306.86 -850.75,296.52 -850.75,120.43 -864.06,107.12 -864.06,-16.73 -842.4,-38.39 -842.4,-196.58 -799.25,-239.74 D18.3@-769.16,-239.74
  Bottom Layer w7.87: v1(-802,371) -802,507.69 -791.69,518 -791.69,585.75 -815.06,609.12 -815.06,802.99 -508.05,1110 -376.57,1110 -315.98,1170.59 U2.15@-125,1170.59
D18_R: D18.2 U2.14 | length 1955.9
  Top Layer w7.87: v1(-777.69,409) -777.69,347.31 -835,290 -835,104.01 -848.31,90.7 -848.31,2.49 -826.66,-19.17 -826.66,-177.34 -798.42,-205.58 -754.34,-205.58 D18.2@-730.52,-229.39
  Bottom Layer w7.87: v1(-777.69,409) -775.94,410.75 -775.94,601.5 -799.31,624.87 -799.31,787.24 -496.55,1090 -373.22,1090 -312.32,1150.91 U2.14@-125,1150.91
D19_B: D19.4 U2.16 | length 2641.7
  Top Layer w7.87: D19.4@-805,32.5 -805,53 -783.06,74.94 -783.06,109.31 -815,141.25 -815,275 v1(-784,306) ; v1(-263,1195) -230,1228 v1(-230,1307.49)
  Bottom Layer w7.87: v1(-784,306) -1026,306 -1065,345 -1065,1255 -1008.81,1311.19 -233.71,1311.19 v1(-230,1307.49) ; v1(-263,1195) -258.28,1190.28 U2.16@-125,1190.28
D19_G: D19.3 U2.18 | length 2078.2
  Top Layer w7.87: v1(-1105,180) -1105,370 -690,785 -690,885 v1(-401,1174) ; v1(-808,85) -826.66,66.34 -826.66,5.92 -805,-15.73 D19.3@-805,-32.5
  Bottom Layer w7.87: v1(-1105,180) -1105,145 -1045,85 v1(-808,85) ; v1(-401,1174) -354.12,1220.88 -332.94,1220.88 -318.64,1235.18 -223.63,1235.18 U2.18@-125,1229.64
D19_R: D19.2 U2.17 | length 1974.5
  Top Layer w7.87: v1(-911.3,-69) -911.3,160.27 -897.99,173.58 -897.99,450.01 v1(-816,532) ; v1(-802,-69) -782,-69 -765,-52 D19.2@-765,-32.5
  Bottom Layer w7.87: v1(-911.3,-69) v1(-802,-69) ; v1(-816,532) -830.81,546.81 -830.81,812.19 -508,1135 -379.57,1135 -295.14,1219.43 -248.85,1219.43 U2.17@-125,1209.96
D20_B: D20.4 U2.22 | length 1629.8
  Top Layer w7.87: D20.4@-769.16,239.74 -759.69,249.21 v1(-759.69,330.56)
  Bottom Layer w7.87: v1(-759.69,330.56) -833.56,330.56 -862.3,359.3 -862.3,837.24 -404.1,1295.44 -254.31,1295.44 -242.04,1283.17 -197.97,1283.17 -172.76,1308.39 U2.22@-125,1308.39
D20_G: D20.3 U2.24 | length 2610.7
  Top Layer w7.87: D20.3@-785.98,176.96 -785.98,144.98 -761,120 v1(-755,120)
  Bottom Layer w7.87: v1(-755,120) -1036,120 -1013,143 -1110,240 -1110,1295 -1062.31,1342.69 -278.81,1342.69 -243.75,1377.75 -225.66,1377.75 -195.67,1347.76 U2.24@-125,1347.76
D20_R: D20.2 U2.23 | length 2465.1
  Top Layer w7.87: D20.2@-747.34,166.6 -747.34,166.34 v1(-721,140)
  Bottom Layer w7.87: v1(-721,140) -726,145 -992.73,145 -1085,237.27 -1085,1275 -1033.06,1326.94 -262.34,1326.94 -256.94,1332.34 -201.34,1332.34 -197.07,1328.07 U2.23@-125,1328.07
D21_B: D21.4 U2.4 | length 937.7
  Top Layer w7.87: D21.4@-680.9,430.65 -680.9,437 -654.02,437 -652.43,438.59 -590.59,438.59 v1(-561,409)
  Bottom Layer w7.87: v1(-561,409) -505,409 -347.31,566.69 -347.31,721.69 -305.15,763.85 -305.15,842.31 -193.4,954.06 U2.4@-125,954.05
D21_G: D21.3 U2.6 | length 1027
  Top Layer w7.87: D21.3@-713.4,374.35 -713.4,435.6 -688.84,460.16 -561.16,460.16 v1(-543,442)
  Bottom Layer w7.87: v1(-543,442) -363.06,621.94 -363.06,847.57 -340,870.63 -321.37,870.63 -201,991 -163.52,991 U2.6@-125,993.43
D21_R: D21.2 U2.5 | length 1048.4
  Top Layer w7.87: D21.2@-678.76,348 D21.2@-678.76,354.35 -693.11,340 -726,340 -742,356 -742,515.39 -632.39,625 -608,625 -469,764 -405.73,764 v1(-334.91,834.81)
  Bottom Layer w7.87: v1(-334.91,834.81) -195.99,973.74 U2.5@-125,973.74
D22_B: D22.4 U2.10 | length 866.6
  Top Layer w7.87: D22.4@-546.24,592.2 -407.8,592.2 -381.13,618.87 -381.13,665.34 -382.29,666.5 -382.29,677.29 -409,704 -409,714 v1(-433.88,738.88)
  Bottom Layer w7.87: v1(-433.88,738.88) -433.88,856.92 -406.47,884.33 -406.47,939.89 -292.37,1053.99 -224.09,1053.99 -213.78,1064.29 -171.87,1064.29 -164,1072.17 U2.10@-125,1072.16
D22_G: D22.3 U2.12 | length 1698.9
  Top Layer w7.87: v1(-775,760) -775,917.73 -328.31,1364.42 -328.31,1377.07 -314.06,1391.31 -284,1391.31 -272.69,1380 -272.69,1310.69 -288,1295.38 -288,1173 v1(-223,1108) ; v1(-684,488.31) -647.92,488.31 -607.88,528.35 D22.3@-592.2,546.24
  Bottom Layer w7.87: v1(-775,760) -775,703 -684,612 v1(-684,488.31) ; v1(-223,1108) -219.46,1111.54 U2.12@-125,1111.53
D22_R: D22.2 U2.11 | length 948.2
  Top Layer w7.87: v1(-597,496.12) -563.92,496.12 D22.2@-563.92,517.96
  Bottom Layer w7.87: v1(-597,496.12) -560.94,532.18 -560.94,753 -422.22,891.72 -422.22,968.83 -311,1080.04 -195.47,1080.04 -183.66,1091.85 U2.11@-125,1091.85
D23_B: D23.4 U2.19 | length 879.6
  Top Layer w7.87: D23.4@-374.35,713.4 -332.4,713.4 v1(-323,704) ; v1(-117,704) -106.32,714.68 -106.32,849.3 -101.06,854.56 -101.06,865.44 -108.49,872.87 -108.49,1211.51 v1(-74,1246)
  Bottom Layer w7.87: v1(-323,704) v1(-117,704) ; U2.19@-125,1249.33 -77.33,1249.33 v1(-74,1246)
D23_G: D23.3 U2.21 | length 1261.4
  Top Layer w7.87: v1(-610,595) -524.1,680.9 D23.3@-430.65,680.9 ; v1(-485,1010) -350,1145 -350,1244.43 v1(-373,1267.43)
  Bottom Layer w7.87: v1(-610,595) -610,810.84 -485,935.84 v1(-485,1010) ; v1(-373,1267.43) -189.94,1267.43 -168.67,1288.7 U2.21@-125,1288.7
D23_R: D23.2 U2.20 | length 1959.4
  Top Layer w7.87: v1(-658,516.35) -652.72,516.35 -522.81,646.26 D23.2@-410.65,646.26
  Bottom Layer w7.87: v1(-658,516.35) -658,475 -786.69,346.31 -825.31,346.31 -846.56,367.55 -846.56,830.72 -440.64,1236.63 -348.08,1236.63 -333.28,1251.43 -174.19,1251.43 -156.6,1269.02 U2.20@-125,1269.01
D24_B: D24.4 U2.25 | length 677.6
  Top Layer w7.87: D24.4@-176.96,785.98 -180,789.03 -180,853 -173.06,859.94 -173.06,1255.94 -74,1355 v1(-74,1367.44)
  Bottom Layer w7.87: U2.25@-125,1367.44 v1(-74,1367.44)
D24_G: D24.3 U2.27 | length 857.2
  Top Layer w7.87: v1(-304,1367) -304,1148.55 -207.44,1052 -207.44,897.87 -221.81,883.51 -221.81,769.16 D24.3@-239.74,769.16
  Bottom Layer w7.87: v1(-304,1367) -264.19,1406.81 U2.27@-125,1406.81
D24_R: D24.2 U2.26 | length 745.9
  Top Layer w7.87: D24.2@-229.39,730.52 -205.94,731.58 -205.94,870.12 -189,887.06 v1(-189,1380)
  Bottom Layer w7.87: v1(-189,1380) -181.87,1387.13 U2.26@-125,1387.12